# Altium PCB 5G智慧网关工装PCB.PcbDoc
Units mm, origin at the board's own origin, x right, y up, seen from the top; angles counter-clockwise.
Board outline 150.43 x 130.46 mm, 2 copper layers (Component Side, Bottom Layer), stack 0.325 mm thick; 117 components, 102 nets, 381 pads, 294 vias.
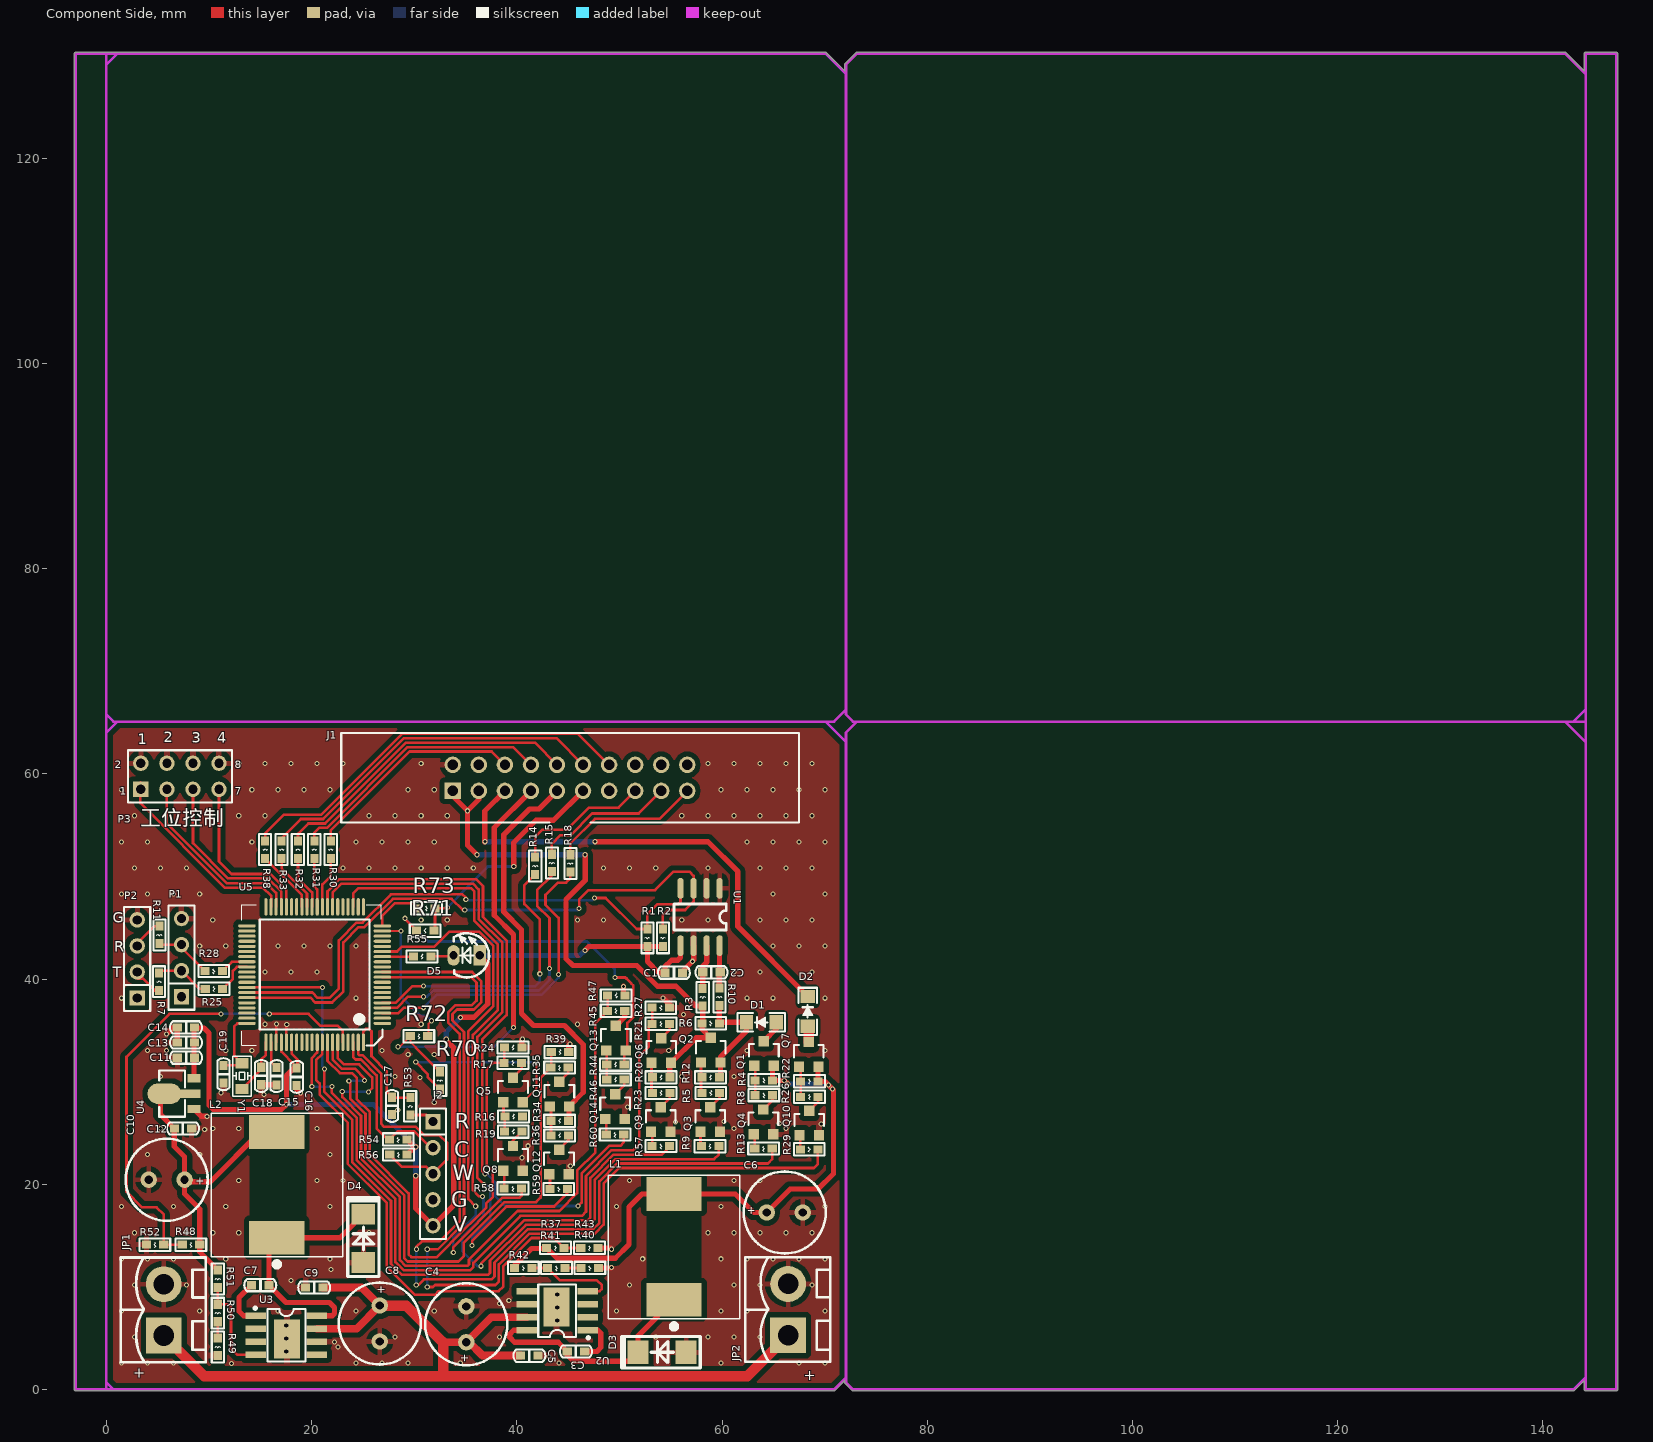
[diagram p0: Component Side view]
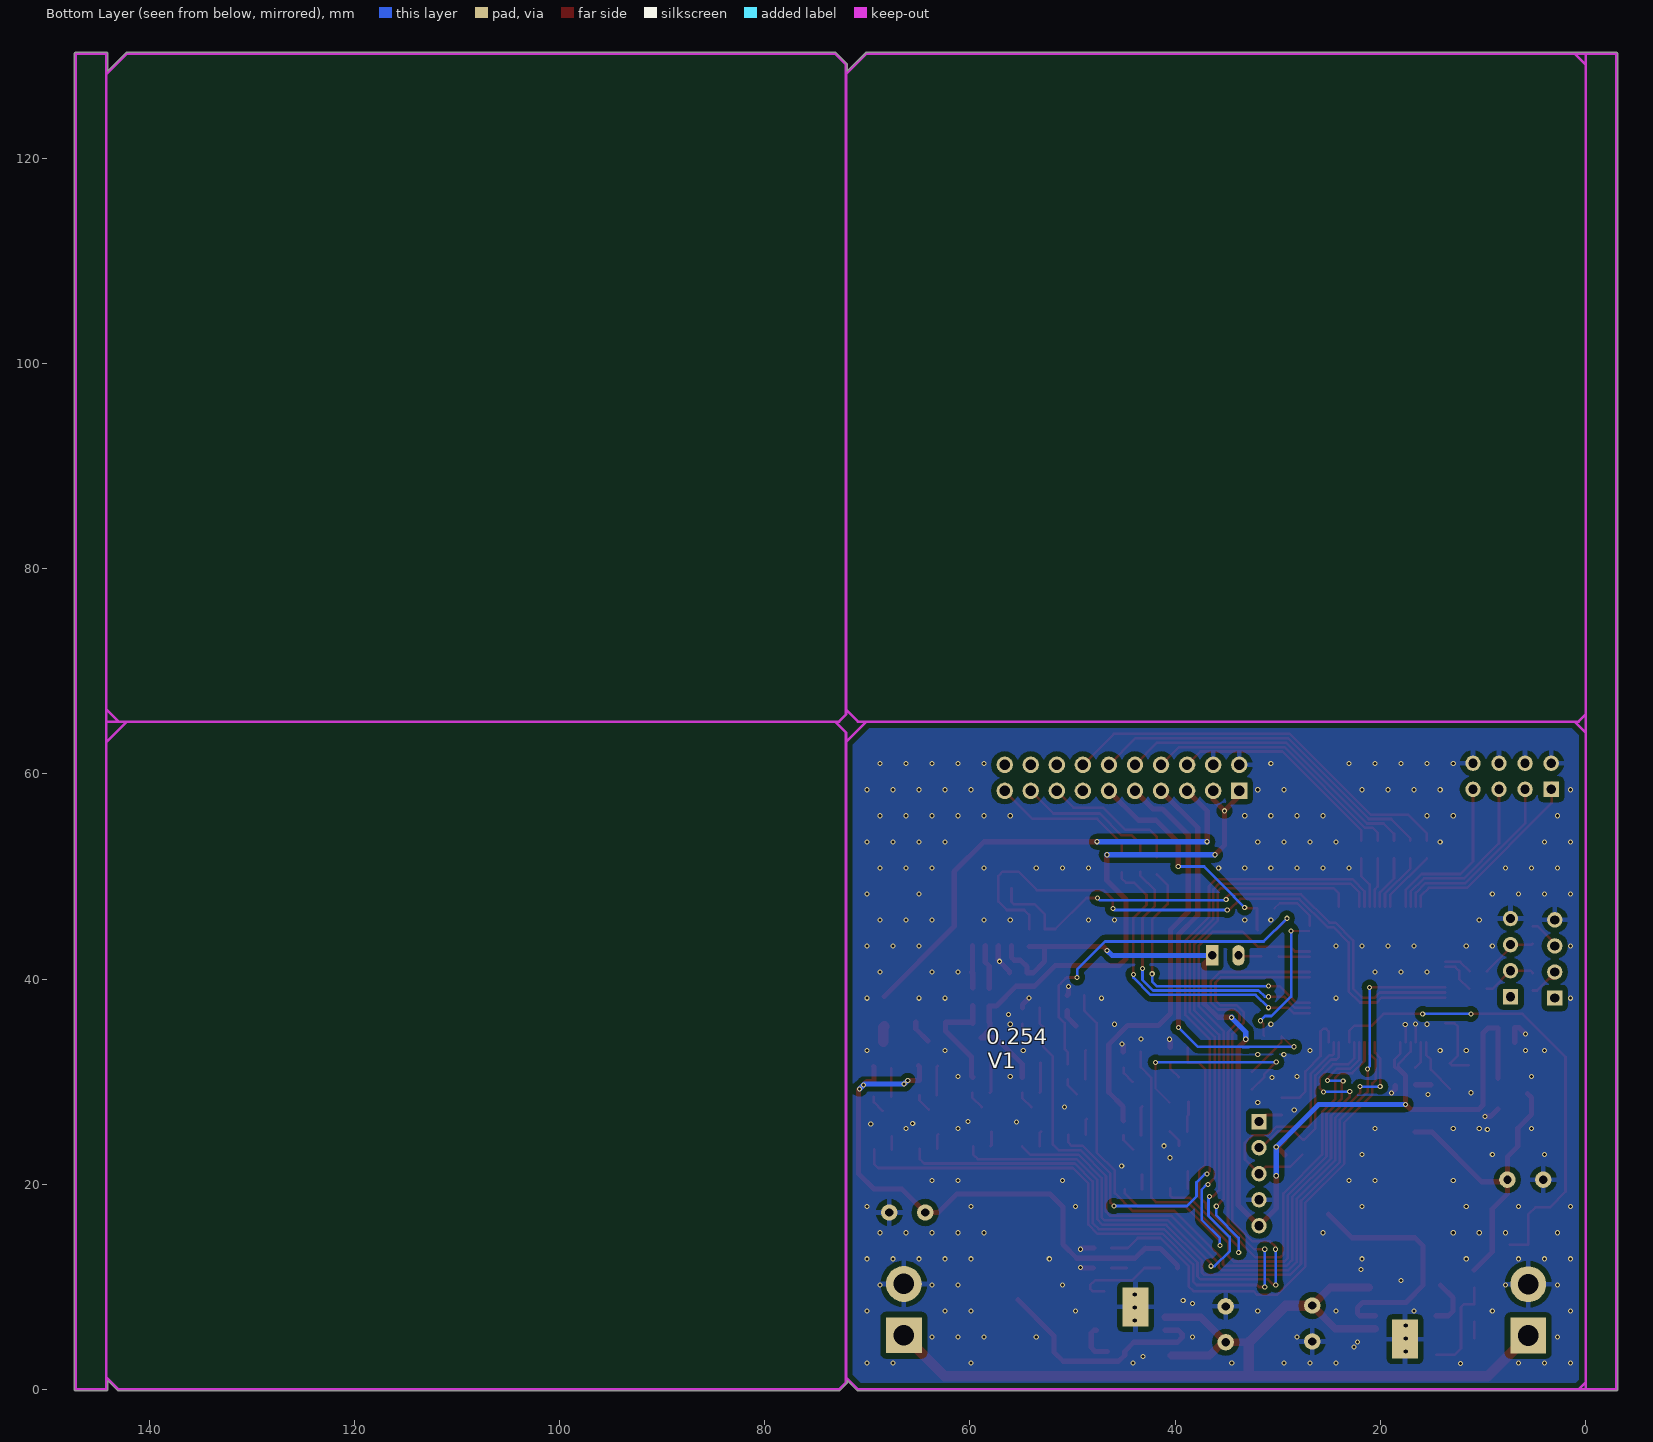
[diagram p1: Bottom Layer view, seen from below]

## Layer stack, top to bottom
Top Solder: solder mask 0.0102, Solder Resist, Dk 3.5
Component Side: signal copper 0.0356
Dielectric 1: core 0.254, FR-4, Dk 4.2
Bottom Layer: signal copper 0.0356
Solder Side: solder mask 0.0102, Solder Resist, Dk 3.5

## Board outline
-3,-0.127 0,-0.127 ccw(c0,0) 0.013,-0.127 ccw(c0.025,0) 0.025,-0.127 70.917,-0.127 ccw(c70.917,0) 71.007,-0.09 71.958,0.861 71.958,0.686 ccw(c72.085,0.686) 71.996,0.595 71.995,0.596 72.681,-0.09 72.68,-0.09 ccw(c72.771,0) 72.771,-0.127 143.002,-0.127 ccw(c143.002,0) 143.093,-0.09 143.092,-0.09 144.043,0.861 144.043,0.025 ccw(c144.17,0.025) 144.044,0.013 ccw(c144.17,0) 144.17,-0.127 147.17,-0.127 ccw(c147.17,0) 147.298,0 147.298,130.2 ccw(c147.17,130.2) 147.17,130.328 144.17,130.328 ccw(c144.17,130.2) 144.043,130.2 144.043,128.501 142.254,130.29 ccw(c142.164,130.2) 142.164,130.328 73.152,130.328 ccw(c73.152,130.2) 73.061,130.29 73.062,130.29 71.995,129.224 71.996,129.224 ccw(c72.085,129.134) 71.958,129.134 71.958,128.501 70.169,130.29 ccw(c70.079,130.2) 70.079,130.328 -3,130.328 ccw(c-3,130.2) -3.127,130.2 -3.127,0 ccw(c-3,0)

## Design rules (kind name [scope] priority, off if disabled: settings)
Clearance VIA-VIA [ISVIA vs ISVIA] p1: gap=0.508 ignorepadtopadclearanceinfootprint=FALSE except(0: Arc-Hole Track-Hole SMDPad-Hole THPad-Hole Via-Hole Fill-Hole Poly-Hole Region-Hole Text-Hole)
Clearance VIA-PAD [ISVIA vs ISPAD] p2: gap=0.381 ignorepadtopadclearanceinfootprint=FALSE except(0: Arc-Hole Track-Hole SMDPad-Hole THPad-Hole Via-Hole Fill-Hole Poly-Hole Region-Hole Text-Hole)
Clearance VIA-TRACK [ISVIA vs ISTRACK] p3: gap=0.381 ignorepadtopadclearanceinfootprint=FALSE except(0: Arc-Hole Track-Hole SMDPad-Hole THPad-Hole Via-Hole Fill-Hole Poly-Hole Region-Hole Text-Hole)
Clearance Polygon [InPolygon] p4: gap=0.508 ignorepadtopadclearanceinfootprint=FALSE except(0: Arc-Hole Track-Hole SMDPad-Hole THPad-Hole Via-Hole Fill-Hole Poly-Hole Region-Hole Text-Hole; 1.016: Poly-Poly)
Clearance [All] p5: gap=0.178 ignorepadtopadclearanceinfootprint=FALSE except(0: Arc-Hole Track-Hole SMDPad-Hole THPad-Hole Via-Hole Fill-Hole Poly-Hole Region-Hole Text-Hole)
ComponentClearance [All] p1 off: gap=0.254 collisioncheckmode=3 verticalgap=0.254 showdistances=FALSE
FabricationTestPointUsage TestPointUsage [All] p1: valid=0 allowmultiple=FALSE
FabricationTestpoint Testpoint [(IsPad And (OnTopLayer Or OnBottomLayer))] p1: side=3 testpointundercomponent=TRUE minsize=1.016 maxsize=2.54 preferedsize=1.524 minholesize=0 maxholesize=1.016 preferedholesize=0.813 testpointgrid=0.025 allowsidetop=TRUE allowsidebottom=TRUE usegrid=TRUE gridtolerance=0
HoleSize [All] p1 off: absolutevalues=TRUE maxlimit=7.62 minlimit=0 maxpercent=80.000 minpercent=20.000
HoleToHoleClearance [All] p1 off: gap=0.254 allowstackedmicrovias=TRUE
LayerPairs [All] p1 off: enforce=TRUE
MinimumSolderMaskSliver [All] p1 off: minsoldermaskwidth=0.254
NetAntennae [All] p1 off: netantennaetolerance=0
PlaneConnect [All] p1: planeconnectstyle=Relief reliefexpansion=0.508 reliefentries=4 reliefconductorwidth=0.508 reliefairgap=0.254
PolygonConnect [isvia] p1: connectstyle=Direct reliefconductorwidth=0.381 reliefentries=4 polygonreliefangle="90 Angle" airgapwidth=0.254
PolygonConnect PolygonConnect_1 [All] p2: connectstyle=Relief reliefconductorwidth=0.508 reliefentries=4 polygonreliefangle="90 Angle" airgapwidth=0.508
RoutingVias [All] p1: holewidth=0.254 width=0.508 viastyle="Through Hole" minholewidth=0.127 minwidth=0.127 maxholewidth=1.27 maxwidth=2.54
SilkToBoardRegionClearance [All] p1 off:
SilkToSilkClearance [All] p1 off: silktosilkclearance=0.254
SilkToSolderMaskClearance [IsPad] p1 off: minsilkscreentomaskgap=0.254 clearancetoexposedcopper=TRUE
SolderMaskExpansion [All] p1: expansion=0.102
Width [All] p1: maxlimit=7.62 minlimit=0.203 preferedwidth=0.203
18 further rules are at their usual default settings.

## Classes and differential pairs
component class 5G智慧网关工装1: C1 C2 C3 C4 C5 C6 C7 C8 C9 C10 C11 C12 C13 C14 D1 D2 D3 D4 J1 JP1 JP2 L1 L2 P1 P2 P3 Q1 Q2 Q3 Q4 Q5 Q6 Q7 Q8 Q9 Q10 Q11 Q12 Q13 Q14 R1 R2 R3 R4 R5 R6 R7 R8 R9 R10 R11 R12 R13 R14 R15 R16 R17 R18 R19 R20 R21 R22 R23 R24 R25 R26 R27 R28 R29 R30 R31 R32 R33 R34 R35 R36 R37 R38 R39 R40 R41 R42 R43 R44 R45 R46 R47 R48 R49 R50 R51 R52 R57 R58 R59 R60 R70 R71 R72 R73 U1 U2 U3 U4
component class 5G智慧网关工装2: C15 C16 C17 C18 C19 D5 J2 R53 R54 R55 R56 U5 Y1

## Components (designator, comment, footprint, x,y, rotation, side; value= is the part's Value field where it differs from the comment)
C1 "100nF/50V" CAP0603 56.134,40.615 r180 top
C2 "100nF/50V" CAP0603 58.141,40.665 r0 top
C3 "10N/50V" CAP0603 44.933,3.708 r0 top
C4 "1000uF/16V" CAPPC_350_800_1600 35.077,4.597 r90 top
C5 "100N/50V" CAP0603 40.386,3.302 r0 top
C6 "1000uF/16V" CAPPC_350_800_1600 64.364,17.247 r0 top
C7 "10N/50V" CAP0603 15.824,10.16 r180 top
C8 "1000uF/16V" CAPPC_350_800_1600 26.645,8.179 r270 top
C9 "100N/50V" CAP0603 21.082,9.931 r180 top
C10 "1000uF/16V" CAPPC_350_800_1600 7.62,20.447 r180 top
C11 "10uF/10V" CAP0603 8.585,32.334 r180 top
C12 "100nF/50V" CAP0603 6.629,25.451 r0 top
C13 "100N/50V" CAP0603 8.585,33.807 r180 top
C14 "22pF/50V" CAP0603 8.585,35.281 r180 top
C15 "100nF/50V" CAP0603 16.586,31.369 r270 top
C16 "100nF/50V" CAP0603 18.542,29.642 r90 top
C17 "33pF/50V" CAP0603 27.838,28.473 r270 top
C18 "12pF/50V" CAP0603 15.088,31.394 r270 top
C19 "12pF/50V" CAP0603 11.405,29.896 r90 top
D1 "DSK36" SOD-123FL 65.354,35.789 r180 top
D2 "DSK36" SOD-123FL 68.351,35.331 r90 top
D3 "B340A-SMA" DO-214AC 54.153,3.632 r180 top
D4 "B340A-SMA" DO-214AC 25.044,14.732 r90 top
D5 "LED_T3R" LED2_300 36.373,42.316 r270 top
J1 "DC254_2*10" DC254_2*10 45.187,59.614 r90 top
J2 "PIN254_1*5*WXHJ" PIN254_1*5*1100S 31.826,26.111 r270 top
JP1 "KF129_508_2" KF129_508_2 5.588,5.258 r90 top
JP2 "KF129_508_2" KF129_508_2 66.446,5.283 r90 top
L1 "LQS1260M2200_47uH" LQS1212 55.321,13.894 r90 top
L2 "LQS1260M2200_47uH" LQS1212 16.612,19.939 r90 top
P1 "PIN254_1*4*WXHJ" PIN254_1*4*1100S 7.315,38.278 r90 top
P2 "PIN254_1*4*WXHJ" PIN254_1*4*1100S 2.997,38.151 r90 top
P3 "Header 4X2" HDR2X4 3.353,58.496 r0 top
Q1 "RZR040P01TL" SOT-23 64.079,32.751 r0 top
Q2 "RZR040P01TL" SOT-23 58.903,33.071 r0 top
Q3 "NPNS-9013" SOT-23 58.852,26.314 r0 top
Q4 "NPNS-9013" SOT-23 64.033,26.086 r0 top
Q5 "PNPS-9012" SOT-23 39.624,29.185 r0 top
Q6 "PNPS-9012" SOT-23 54.077,33.045 r0 top
Q7 "RZR040P01TL" SOT-23 68.453,32.664 r0 top
Q8 "NPNS-9013" SOT-23 39.624,22.53 r0 top
Q9 "NPNS-9013" SOT-23 54.026,26.314 r0 top
Q10 "NPNS-9013" SOT-23 68.504,25.959 r0 top
Q11 "PNPS-9012" SOT-23 44.145,28.778 r0 top
Q12 "NPNS-9013" SOT-23 44.115,22.184 r0 top
Q13 "PNPS-9012" SOT-23 49.657,34.239 r0 top
Q14 "NPNS-9013" SOT-23 49.581,27.559 r0 top
R1 "10K 5%" RES0603 52.73,43.18 r90 top
R2 "10K 5%" RES0603 54.229,43.18 r90 top
R3 "10R 5%" RES0603 58.115,37.389 r90 top
R4 "2M 5%" RES0603 64.922,30.124 r180 top
R5 "200K 5%" RES0603 58.064,28.905 r0 top
R6 "100R 1%" RES0603 59.741,35.687 r180 top
R7 "22R 5%" RES0603 5.131,40.589 r270 top
R8 "200K 5%" RES0603 64.922,28.677 r180 top
R9 "1K 5%" RES0603 57.988,23.724 r0 top
R10 "10R 5%" RES0603 59.741,37.414 r90 top
R11 "22R 5%" RES0603 5.156,43.459 r90 top
R12 "2M 5%" RES0603 58.039,30.429 r0 top
R13 "1K 5%" RES0603 64.897,23.47 r180 top
R14 "1K 5%" RES0603 41.783,50.19 r90 top
R15 "1K 5%" RES0603 43.409,50.47 r90 top
R16 "100K 5%" RES0603 38.837,26.619 r0 top
R17 "100K 5%" RES0603 40.462,31.826 r180 top
R18 "1K 5%" RES0603 45.212,50.419 r90 top
R19 "10K 1%" RES0603 38.811,25.146 r0 top
R20 "100K 5%" RES0603 53.213,30.429 r0 top
R21 "100K 5%" RES0603 54.889,35.636 r180 top
R22 "2M 5%" RES0603 69.367,30.023 r180 top
R23 "10K 1%" RES0603 53.213,28.905 r0 top
R24 "10K 5%" RES0603 38.786,33.35 r0 top
R25 "1K 5%" RES0603 11.328,39.04 r180 top
R26 "200K 5%" RES0603 69.367,28.524 r180 top
R27 "10K 5%" RES0603 53.188,37.211 r0 top
R28 "1K 5%" RES0603 11.303,40.767 r180 top
R29 "1K 5%" RES0603 69.342,23.393 r180 top
R30 "1K 5%" RES0603 21.869,53.467 r270 top
R31 "1K 5%" RES0603 20.269,53.467 r270 top
R32 "1K 5%" RES0603 18.669,53.467 r270 top
R33 "1K 5%" RES0603 17.069,53.467 r270 top
R34 "100K 5%" RES0603 43.332,26.187 r0 top
R35 "100K 5%" RES0603 45.009,31.369 r180 top
R36 "10K 1%" RES0603 43.332,24.765 r0 top
R37 "100K 5%" RES0603 44.602,13.792 r180 top
R38 "1K 5%" RES0603 15.469,53.467 r270 top
R39 "10K 5%" RES0603 43.358,32.893 r0 top
R40 "20K 1%" RES0603 47.955,11.836 r180 top
R41 "10K 1%" RES0603 44.704,11.836 r180 top
R42 "100K 1%" RES0603 41.478,11.836 r180 top
R43 "10K 5%" RES0603 47.93,13.792 r180 top
R44 "100K 5%" RES0603 48.768,31.674 r0 top
R45 "100K 5%" RES0603 50.521,36.906 r180 top
R46 "10K 1%" RES0603 48.768,30.226 r0 top
R47 "10K 5%" RES0603 48.844,38.405 r0 top
R48 "100K 5%" RES0603 7.391,14.122 r0 top
R49 "20K 5%" RES0603 10.846,3.302 r90 top
R50 "10K 1%" RES0603 10.846,6.604 r90 top
R51 "100K 1%" RES0603 10.846,9.931 r90 top
R52 "10K 5%" RES0603 3.886,14.122 r0 top
R53 "100R 5%" RES0603 29.616,28.448 r270 top
R54 "10K 5%" RES0603 29.286,24.359 r180 top
R55 "1K 5%" RES0603 29.921,42.215 r0 top
R56 "10K 5%" RES0603 29.312,22.885 r180 top
R57 "1K 5%" RES0603 54.889,23.724 r180 top
R58 "1K 5%" RES0603 40.462,19.583 r180 top
R59 "1K 5%" RES0603 44.933,19.533 r180 top
R60 "1K 5%" RES0603 50.419,24.841 r180 top
R70 "0" RES0603 32.512,29.261 r90 top
R71 "0" RES0603 30.226,44.729 r0 top
R72 "1K 5%" RES0603 29.616,34.442 r0 top
R73 "1K 5%" RES0603 32.029,46.888 r180 top
U1 "INA219" SO-8 59.766,48.844 r270 top
U2 "TPS5430DDA" SOP-8-P 46.914,5.766 r180 top
U3 "TPS5430DDA" SOP-8-P 14.554,7.188 r0 top
U4 "CE6232A33P" SOT-89 7.645,28.829 r90 top
U5 "FM33LG0x8" LQFP80 20.295,40.437 r180 top
Y1 "32.768kD" SMD-3215_2P 13.208,29.286 r90 top

## Footprints (in the part's own frame and the unit in brackets; to place one, negate y for a bottom-side part, rotate by r counter-clockwise, add the part's x,y. Pads: shape width x height; smd on the part's side, far side on the other; paste and mask are expansions set on the pad)
CAP0603 [mil]
  rect 35x31 smd: 1(-0.49,0) 2(66.51,0)
  silkscreen extent -29,-24 94,23, body extent 1,-15 72,15, height 20
CAPPC_350_800_1600 [mm]
  round 1.6 hole 0.8: 1(0,0) 2(3.5,0)
  silkscreen extent -2.25,-4 5.75,4, body extent -2.26,-4 5.75,4, height 15.11
DC254_2*10 [mm]
  rect 1.6x1.6 hole 1: 1(-1.27,11.43)
  round 1.6 hole 1: 2(1.27,11.43) 3(-1.27,8.89) 4(1.27,8.89) 5(-1.27,6.35) 6(1.27,6.35) 7(-1.27,3.81) 8(1.27,3.81) 9(-1.27,1.27) 10(1.27,1.27) 11(-1.27,-1.27) 12(1.27,-1.27) 13(-1.27,-3.81) 14(1.27,-3.81) 15(-1.27,-6.35) 16(1.27,-6.35) 17(-1.27,-8.89) 18(1.27,-8.89) 19(-1.27,-11.43) 20(1.27,-11.43)
  silkscreen extent -4.35,-22.3 4.35,22.3
DO-214AC [mil]
  rect 80x90.55 smd: 1(-92.5,0) 2(92.5,0)
  silkscreen extent -146,-60 156,60, body extent -91,-53 90,53, height 94
HDR2X4 [mm] "Connector; Header; 4x2 Position"
  rect 1.5x1.5 hole 0.9: 1(0,0)
  round 1.5 hole 0.9: 2(0,2.54) 3(2.54,0) 4(2.54,2.54) 5(5.08,0) 6(5.08,2.54) 7(7.62,0) 8(7.62,2.54)
  silkscreen extent -1.27,-1.27 8.89,3.81
KF129_508_2 [mm]
  rect 3.5x3.5 hole 2: 1(0,0)
  round 3.5 hole 2: 2(5,0)
  silkscreen extent -2.6,-4.1 7.6,4.2
LED2_300 [mm]
  rect 2x1.2 hole 0.813: 1(0,0)
  oval 2x1.2 hole 0.813: 2(0,-2.54)
  silkscreen extent -2.16,-2.53 2.16,0.91, body extent -1.65,-2.91 1.64,0.39, height 5.51
LQFP80 [mm]
  oval 1.7x0.3 smd: 1(-6.6,4.75) 2(-6.6,4.25) 3(-6.6,3.75) 4(-6.6,3.25) 5(-6.6,2.75) 6(-6.6,2.25) 7(-6.6,1.75) 8(-6.6,1.25) 9(-6.6,0.75) 10(-6.6,0.25) 11(-6.6,-0.25) 12(-6.6,-0.75) 13(-6.6,-1.25) 14(-6.6,-1.75) 15(-6.6,-2.25) 16(-6.6,-2.75) 17(-6.6,-3.25) 18(-6.6,-3.75) 19(-6.6,-4.25) 20(-6.6,-4.75) 41(6.6,-4.75) 42(6.6,-4.25) 43(6.6,-3.75) 44(6.6,-3.25) 45(6.6,-2.75) 46(6.6,-2.25) 47(6.6,-1.75) 48(6.6,-1.25) 49(6.6,-0.75) 50(6.6,-0.25) 51(6.6,0.25) 52(6.6,0.75) 53(6.6,1.25) 54(6.6,1.75) 55(6.6,2.25) 56(6.6,2.75) 57(6.6,3.25) 58(6.6,3.75) 59(6.6,4.25) 60(6.6,4.75)
  oval 0.3x1.7 smd: 21(-4.75,-6.6) 22(-4.25,-6.6) 23(-3.75,-6.6) 24(-3.25,-6.6) 25(-2.75,-6.6) 26(-2.25,-6.6) 27(-1.75,-6.6) 28(-1.25,-6.6) 29(-0.75,-6.6) 30(-0.25,-6.6) 31(0.25,-6.6) 32(0.75,-6.6) 33(1.25,-6.6) 34(1.75,-6.6) 35(2.25,-6.6) 36(2.75,-6.6) 37(3.25,-6.6) 38(3.75,-6.6) 39(4.25,-6.6) 40(4.75,-6.6) 61(4.75,6.6) 62(4.25,6.6) 63(3.75,6.6) 64(3.25,6.6) 65(2.75,6.6) 66(2.25,6.6) 67(1.75,6.6) 68(1.25,6.6) 69(0.75,6.6) 70(0.25,6.6) 71(-0.25,6.6) 72(-0.75,6.6) 73(-1.25,6.6) 74(-1.75,6.6) 75(-2.25,6.6) 76(-2.75,6.6) 77(-3.25,6.6) 78(-3.75,6.6) 79(-4.25,6.6) 80(-4.75,6.6)
  silkscreen extent -6.62,-6.81 7.1,6.91, body extent -5.33,-5.33 5.36,5.33, height 2
LQS1212 [mm]
  rect 3.3x5.4 smd: 1(-5.15,0) 2(5.15,0)
  silkscreen extent -8,-6.4 7,6.4, body extent -6.35,-6.1 6.35,6.1, height 6
PIN254_1*4*1100S [mm] "Connector; Header; 4 Position"
  rect 1.5x1.5 hole 0.9: 1(0,0)
  round 1.5 hole 0.9: 2(2.54,0) 3(5.08,0) 4(7.62,0)
  silkscreen extent -1.27,-1.27 8.89,1.27, body extent -1.3,-1.3 8.86,1.24, height 8.54
PIN254_1*5*1100S [mm]
  rect 1.5x1.5 hole 0.9: 1(0,0)
  round 1.5 hole 0.9: 2(2.54,0) 3(5.08,0) 4(7.62,0) 5(10.16,0)
  silkscreen extent -1.27,-1.27 11.43,1.27
RES0603 [mil]
  rect 35x31 smd: 1(0,0) 2(67,0)
  silkscreen extent -26,-24 92,23, body extent 0,-15 71,15, height 12
SMD-3215_2P [mm]
  rect 1x1.3 smd: 1(0,0) 2(2.5,0)
  silkscreen extent -0.69,-0.91 3.19,0.91, body extent -0.3,-0.99 2.9,0.99, height 0.7
SO-8 [mil]
  oval 80x24 smd: 1(0,0) 2(0,-50) 3(0,-100) 4(0,-150) 5(220,-150) 6(220,-100) 7(220,-50) 8(220,0)
  silkscreen extent 60,-175 160,25, body extent -7,-171 229,21, height 67
SOD-123FL [mm]
  rect 1.3x1.4 smd: 1(0.074,0) 2(2.974,0)
  silkscreen extent -0.78,-0.9 3.82,0.9, body extent -0.28,-0.82 3.32,0.82, height 0.95
SOP-8-P [mm]
  rect 2x0.6 smd: 1(0,0) 2(0,-1.27) 3(0,-2.54) 4(0,-3.81) 5(5.94,-3.81) 6(5.94,-2.54) 7(5.94,-1.27) 8(5.94,0)
  rect 2.5x3.8 smd: 9(3.048,-2.286)
  rect 2.5x3.8 smd far side: 9(3.048,-2.286)
  silkscreen extent -0.18,-4.44 4.83,0.86, body extent 0.38,-4.57 5.72,0.76, height 1.8
SOT-23 [mil]
  rect 40x40 smd: 1(-37.4,-47.24) 2(37.4,-47.24) 3(0,47.24)
  silkscreen extent -57,-12 57,35, body extent -57,-55 57,55, height 47
SOT-89 [mm]
  rect 0.8x1.27 smd: 1(-1.5,-0.9) 3(1.5,-0.9)
  oval 2x3.3 smd: 2(0,2)
  rect 0.8x2.54 smd: 2(0,-0.265)
  silkscreen extent -2.25,0 2.25,2.5, body extent -2.25,-1.02 2.25,2.92, height 1.4

## Part data
C1 C2 C12 C15 C16: library part 101020103-0021, "104pF,50 V,±10%,0603,国巨,CC0603KRX7R9BB104", Part Name=0603贴片电容, ID=3, Part Number=101020103-0021, SMD/DIP=SMD
C3 C7: library part 101020103-0007, "10N/50V，±10%，0603", Part Name=0603贴片电容, ID=35, Part Number=101020103-0007
C4 C6 C8 C10: library part 1010203-0029, "1000uF,16 V,±20%,8*20mm,Rubycon,16ZLH1000M", Part Name=电解电容, ID=2, Part Number=1010203-0029, SMD/DIP=DIP
C5 C9 C13: library part 101020103-0021, "100N/50V，±10%，0603", Part Name=0603贴片电容, ID=34, Part Number=101020103-0021
C11: library part 101020103-0026, "106pF,10 V,±10%,0603,村田,GRM188R61A106KE47D", Part Name=0603贴片电容, ID=8, Part Number=101020103-0026, SMD/DIP=SMD
C14: library part 101020103-0009, "22pF,50 V,±5%,0603,国巨,CC0603JRNPO9BN22", Part Name=0603贴片电容, ID=16, Part Number=101020103-0009, SMD/DIP=SMD
C17: library part 101020103-0027, "33pF,50 V,±10%,0603,国巨,CC0603KRNPO9BN33", Part Name=0603贴片电容, ID=17, Part Number=101020103-0027, SMD/DIP=SMD
C18 C19: library part 101020103-0005, "12P,50 V,±5%,0603,国巨,CC0603JRNPO9BN12", Part Name=0603贴片电容, ID=11, Part Number=101020103-0005, SMD/DIP=SMD
D1 D2: library part 101040101-0043, "DSK14,SOD-123FL,1 A,40 V,28 V,台湾强茂集团苏州群鑫电子,DSK14", Part Name=二极管, ID=10, Part Number=101040101-0043, SMD/DIP=SMD
D3 D4: library part 101040101-0014, Part Name=贴片肖特基, ID=24, Part Number=101040101-0014
D5: library part 101040102-0001, "圆形插件,3mm 圆形,插件,红光,湖北匡通电子有限公司,3BB4HC", Part Name=发光二极管, ID=6, Part Number=101040102-0001, SMD/DIP=DIP
J1: library part 1010902-0139, "DC2 2.54mm 2x10pin,2.54mm间距，2x10pin，32×8.55×27.5mm,母头,双排,双排牛角座", Part Name=DC牛角座, ID=4, Part Number=1010902-0139, SMD/DIP=DIP
J2: library part AD_WXHJ_PinHeader_02, "1*5 ，Φ1.0 ，2.54mm，直脚,无需焊接器件", Part Name=排针, ID=17, Part Number=AD_WXHJ_PinHeader_02, SMD/DIP=DIP
JP1 JP2: library part 1010904-0015, "KF129-2P,螺丝紧固,2,ABS,松涛", Part Name=接线端子, ID=7, Part Number=1010904-0015, SMD/DIP=DIP
L1 L2: library part 1010302-0007, "47uH/2.2A,±20%，0.072Ω，L1200X1200X600", Part Name=贴片电感, ID=3, Part Number=1010302-0007
P1 P2: library part AD_WXHJ_PinHeader_01, "1*4 ，Φ1.0 ，2.54mm，直脚,无需焊接器件", Part Name=排针, ID=16, Part Number=AD_WXHJ_PinHeader_01, SMD/DIP=DIP
P3: "Header, 4-Pin, Dual row"
Q1 Q2 Q7: library part 101040201-0010, "RZR040P01TL；1.5v导通,P-MOS,SOT-23,罗姆,RZR040P01TL", Part Name=PMOS管, ID=18, Part Number=101040201-0010, SMD/DIP=SMD
Q3 Q4 Q8 Q9 Q10 Q12 Q14: library part 101040201-0002, "9013,NPN,SOT-23,长电,S9013", Part Name=贴片三极管, ID=15, Part Number=101040201-0002, SMD/DIP=SMD
Q5 Q6 Q11 Q13: library part 101040201-0001, "9012,PNP,SOT-23,JCET;长电,S9012", Part Name=贴片三极管, ID=17, Part Number=101040201-0001, SMD/DIP=SMD
R1 R2 R24 R27 R39 R47 R54 R56: library part 101010103-0003, "国巨,±5%,0603,,155 ℃,-55 ℃,RC0603JR-0710KL,无铅,200 ppm/℃,1/10W,,10K", Part Name=0603贴片电阻, ID=7, Part Number=101010103-0003, SMD/DIP=SMD
R3 R10: library part 101010103-0017, "10R,±5%,1/10W,0603,国巨,RC0603JR-0710RL", Part Name=0603贴片电阻, ID=8, Part Number=101010103-0017, SMD/DIP=SMD
R4 R12 R22: library part 101010103-0025, "国巨,±5%,0603,,155 ℃,-55 ℃,RC0603JR-072ML,含铅,100 ppm/℃,1/10W,,2M", Part Name=0603贴片电阻, ID=20, Part Number=101010103-0025, SMD/DIP=SMD
R5 R8 R26: library part 101010103-0034, "200K,±5%,1/10W,0603,国巨,RC0603JR-07200KL", Part Name=0603贴片电阻, ID=13, Part Number=101010103-0034, SMD/DIP=SMD
R6: library part 101010103-0041, "100Ω,±1%,1/10W,0603,国巨股份有限公司,RC0603FR-07100RL", Part Name=0603贴片电阻, ID=4, Part Number=101010103-0041, SMD/DIP=SMD
R7 R11: library part 101010103-0009, "国巨,±5%,0603,,155 ℃,-55 ℃,RC0603JR-0722RL,无铅,200 ppm/℃,1/10W,,22欧", Part Name=0603贴片电阻, ID=18, Part Number=101010103-0009, SMD/DIP=SMD
R9 R13 R14 R15 R18 R25 R28 R29 R30 R31 R32 R33 R38 R55 R57 R58 R59 R60 R72 R73: library part 101010103-0008, "1K,±5%,1/10W,0603,国巨,RC0603JR-071KL", Part Name=0603贴片电阻, Part Number=101010103-0008, SMD/DIP=SMD
  R9 R13 R14 R15 R18 R25 R28 R29 R30 R31 R32 R33 R38 R57 R58 R59 R60 R72 R73: ID=10
  R55: ID=9
R16 R17 R20 R21 R34 R35 R44 R45 R70 R71: library part 101010103-0005, "国巨,±5%,0603,,155 ℃,-55 ℃,RC0603JR-07100KL,无铅,100 ppm/℃,1/10W,,100K", Part Name=0603贴片电阻, ID=3, Part Number=101010103-0005, SMD/DIP=SMD
R19 R23 R36 R46: library part 101010103-0052, "10K±1%,1/10W,0603", Part Name=0603贴片电阻, ID=6, Part Number=101010103-0052, SMD/DIP=SMD
R37 R43 R48 R52: library part 101010103-0005, "100K±5%,1/10W,0603", Part Name=0603贴片电阻, ID=30, Part Number=101010103-0005
R40: library part 101010103-0048, "20K,±1%,1/10W,0603,国巨,RC0603FR-0720KL", Part Name=0603贴片电阻, ID=14, Part Number=101010103-0048, SMD/DIP=SMD
R41 R50: library part 101010103-0053, "8.2k±1%,1/10W,0603", Part Name=0603贴片电阻, ID=142, Part Number=101010103-0053
R42 R51: library part 101010103-0048, "20K±1%,1/10W,0603", Part Name=0603贴片电阻, ID=139, Part Number=101010103-0048
R49: library part 101010103-0004, "国巨,±5%,0603,,155 ℃,-55 ℃,RC0603JR-0720KL,无铅,200 ppm/℃,1/10W,,20K", Part Name=0603贴片电阻, ID=15, Part Number=101010103-0004, SMD/DIP=SMD
R53: library part 101010103-0022, "100R,±5%,1/10W,0603,国巨,RC0603JR-07100RL", Part Name=0603贴片电阻, ID=5, Part Number=101010103-0022, SMD/DIP=SMD
U1: library part Component_2
U2 U3: library part 101050101-0053, "TPS5430DDA,SOP8,TI,TPS5430DDA", Part Name=电源芯片, ID=9, Part Number=101050101-0053, SMD/DIP=SMD
U4: library part 1010503-0029, "CE6232-3.3,CE6232-3.3,SOT89-3,8V,1.8V,0.11V,3.3V,300mA,0.8uA,南京芯力微电子有限公司", Part Name=线性稳压芯片, ID=5, Part Number=1010503-0029, SMD/DIP=SMD
Y1: library part 1010601-0009, Part Name=贴片晶振, Part Number=1010601-0020, ID=20, SMD/DIP=SMD

## Via types
v1: diameter 0.5, hole 0.3, Component Side to Bottom Layer, tented both sides, 288 vias
v2: diameter 0.813, hole 0.406, Component Side to Bottom Layer, 6 vias

## Nets (pads, with @x,y where several pads share a name; then routed paths per layer and width w, separated by ;. In a path a pad name is that pad's centre, name@x,y a point inside that pad or via, vN(x,y) a via of type N, cw(c..) or ccw(c..) an arc to the next point about the centre after c; other vN are vias at no path point)
3.3V: C1.2 C11.1 C13.1 C14.1 C16.2 D5.1 J2.5 R1.1 R2.1 R54.1 R56.1 U1.5 U4.3 U5.64 U5.66 | length 112.2
  Component Side w0.254: U5.64 17.045,32.917 18.276,31.686 18.276,31.331 C16.2 18.618,31.407 18.618,32.156 18.045,32.73 U5.66
  Component Side w0.508: U4.3 8.545,35.228 9.501,35.228 9.982,34.747 9.982,27.711 10.414,27.28 17.043,27.28 v1(17.551,27.788) 17.551,30.607 C16.2@18.276,31.331 ; R54.1 29.997,23.647 v1@30.074,23.647 ; R56.1 v1@30.074,23.647 ; v1(30.15,20.828) 30.15,17.628 J2.5 33.862,17.987 33.862,33.295 33.122,34.036 v1(33.122,34.138) ; v1(30.15,23.647) v1@30.074,23.647 ; v1(34.493,36.271) 35.835,36.271 37.16,37.596 37.16,41.529 D5.1 ; v1(46.634,42.799) 47.015,43.18 R1.1 ; R2.1 R1.1 ; U1.5 55.956,42.113 55.677,41.834 55.067,41.834 54.445,41.211 C1.2 53.823,40.615 52.73,41.707 R1.1
  Bottom Layer w0.508: v1(17.551,27.788) 26.01,27.788 v1(30.15,23.647) v1(30.15,20.828) ; v1(33.122,34.138) 33.122,34.849 34.493,36.22 v1(34.493,36.271) ; D5.1 36.398,42.291 46.126,42.291 v1(46.634,42.799)
5V: C6.1 L1.2 Q1.2 Q7.2 R4.1 R22.1 R37.2 R42.2 | length 59.1
  Component Side w0.508: R42.2 39.776,12.09 41.427,13.741 R37.2@42.901,13.741 ; R37.2 43.913,12.78 49.592,12.78 50.927,14.115 50.927,17.78 52.191,19.044 L1.2 61.296,19.044 63.094,17.247 C6.1 66.65,19.533 69.367,19.533 70.866,21.031 70.866,29.185 v1(70.764,29.286) v1(70.383,29.667) 70.028,30.023 R22.1 69.367,31.429 Q7.2 ; Q1.2 64.922,31.444 R4.1 v1(66.065,30.124) v1(66.421,29.769)
  Bottom Layer w0.508: v1(66.065,30.124) v1(66.421,29.769) 70.282,29.769 v1(70.383,29.667) v1(70.764,29.286)
5V_dianliu_CHK: R9.2 U5.53 | length 78.2
  Component Side w0.254: U5.53 v1(21.051,39.187) ; v1(21.26,31.242) 21.213,31.195 21.213,29.028 23.952,26.289 23.952,22.175 27.737,18.391 27.737,12.243 28.804,11.176 37.211,11.176 37.389,11.354 37.389,12.55 40.892,16.053 47.066,16.053 47.605,16.591 47.605,20.452 49.606,22.454 59.233,22.454 59.69,22.911 R9.2
  Bottom Layer w0.254: v1(21.051,39.187) 21.051,31.501 21.285,31.267 v1(21.26,31.242)
5V_Out: D1.2 Q2.2 R6.1 R10.1 R12.2 | length 10.9
  Component Side w0.508: R12.2 59.853,30.541 Q2.2 59.853,32.395 62.38,34.923 D1.2 59.842,35.789 R6.1 R10.1
5V_Out1: J1.1 J1.3 Q2.3 Q6.2 R3.1 R6.2 R20.2 | length 56.1
  Component Side w0.508: J1.1 33.757,57.836 v1(35.192,56.401) ; v1(36.119,52.121) 35.192,53.048 v1(35.192,56.401) ; J1.3 36.297,57.506 v1(35.192,56.401) ; v1(46.66,52.121) 46.66,49.606 44.806,47.752 44.806,41.986 45.466,41.326 51.689,41.326 53.721,39.294 55.499,39.294 57.404,37.389 R3.1 58.115,35.763 R6.2 58.039,35.134 Q2.3 57.452,34.271 Q6.2 54.915,31.734 R20.2
  Bottom Layer w0.508: v1(36.119,52.121) v1(46.66,52.121)
5V_zhu_CTL: R13.1 U5.10 | length 88.1
  Component Side w0.254: U5.10 35.53,40.187 36.068,39.648 36.068,37.905 35.624,37.461 34,37.461 33.303,36.764 33.303,35.778 34.421,34.661 34.421,16.387 32.461,14.427 30.734,14.427 30.226,13.919 v1(30.226,13.665) ; v1(30.201,10.198) 30.411,10.198 30.953,10.74 37.537,10.74 37.821,11.024 37.821,12.371 41.07,15.621 47.421,15.621 48.037,16.237 48.037,20.273 49.785,22.022 64.465,22.022 64.897,22.454 R13.1
  Bottom Layer w0.254: v1(30.201,10.198) 30.201,13.64 v1(30.226,13.665)
119: J1.14 R38.1 | length 39.5
  Component Side w0.254: R38.1 15.469,54.204 17.297,56.032 20.951,56.032 28.825,63.906 45.974,63.906 J1.14
119_CHK: R38.2 U5.33 | length 6.2
  Component Side w0.254: R38.2 19.045,48.189 U5.33
ADC_5V: R37.1 R43.2 U5.72 | length 48.9
  Component Side w0.254: U5.72 21.045,32.709 20.447,32.112 20.447,30.155 20.773,29.829 20.773,28.757 23.52,26.01 23.52,21.996 27.305,18.212 27.305,11.989 30.07,9.224 32.033,9.224 32.385,9.576 38.227,9.576 38.684,10.033 38.684,12.013 41.428,14.757 43.637,14.757 R37.1 R43.2
ADC_MCU_5V: R48.1 R52.2 U5.76 | length 47
  Component Side w0.254: R48.1 R52.2 5.588,17.043 4.877,17.755 3.48,17.755 1.956,19.279 1.956,32.41 6.147,36.601 v1(11.176,36.601) ; v1(15.875,36.601) 19.71,36.601 20.879,35.433 22.555,35.433 23.045,34.944 U5.76
  Bottom Layer w0.254: v1(11.176,36.601) v1(15.875,36.601)
anjian1: J1.6 R30.1 | length 21.7
  Component Side w0.254: R30.1 21.869,54.508 29.54,62.179 37.541,62.179 J1.6
anjian1_CTRL: R30.2 U5.29 | length 5.1
  Component Side w0.254: U5.29 21.045,49.213 21.869,50.038 R30.2
anjian2: J1.8 R31.1 | length 26.1
  Component Side w0.254: R31.1 20.269,54.28 20.726,54.737 21.487,54.737 29.361,62.611 39.649,62.611 J1.8
anjian2_CTRL: R31.2 U5.30 | length 4.8
  Component Side w0.254: R31.2 20.269,49.022 20.545,48.747 U5.30
anjian3: J1.10 R32.1 | length 30.5
  Component Side w0.254: R32.1 18.669,54.153 19.685,55.169 21.308,55.169 29.182,63.043 41.758,63.043 J1.10
anjian3_CTRL: R32.2 U5.31 | length 5.3
  Component Side w0.254: R32.2 18.669,49.81 20.045,48.435 U5.31
anjian4: J1.12 R33.1 | length 34.8
  Component Side w0.254: R33.1 17.069,53.721 18.948,55.601 21.13,55.601 29.004,63.475 43.866,63.475 J1.12
anjian4_CTRL: R33.2 U5.32 | length 5.8
  Component Side w0.254: R33.2 17.069,50.8 19.545,48.324 U5.32
DY_SY_V3: J1.11 R71.2 R73.1 | length 23
  Component Side w0.203: R71.2 R71.2@32.029,44.831
  Component Side w0.254: R71.2@32.029,44.831 R73.1 33.35,46.888 33.274,46.965 v1(33.223,46.965)
  Component Side w0.508: v1(39.7,50.978) 39.7,53.315 41.859,55.474 43.586,55.474 J1.11
  Bottom Layer w0.254: v1(33.223,46.965) 34.269,48.01 34.269,48.066 37.18,50.978 v1(39.7,50.978)
DY_SY_V3_1: R73.2 U5.20 | length 5.1
  Component Side w0.203: 29.82,47.396 R73.2
  Component Side w0.254: U5.20 26.895,46.173 28.118,47.396 29.82,47.396
DY_SY_V3_CHK: R45.2 R47.1 U5.75 | length 69.8
  Component Side w0.254: U5.75 22.545,32.319 23.169,31.695 24.622,31.695 25.904,30.413 25.904,29.358 v1(25.548,29.003) ; v1(22.987,29.032) 22.987,28.505 24.816,26.676 24.816,22.533 28.6,18.748 28.6,12.601 29.161,12.04 35.179,12.04 35.335,12.196 35.335,12.648 40.086,17.399 44.145,17.399 45.878,19.131 45.878,21.341 47.65,23.114 47.65,35.738 R45.2 48.844,36.932 R47.1
  Bottom Layer w0.254: v1(22.987,29.032) 25.519,29.032 v1(25.548,29.003)
DY_SY_V3_CHK_CTRL: R60.1 U5.28 | length 68.2
  Component Side w0.254: U5.28 21.545,48.546 22.732,49.733 36.043,49.733 36.703,49.073 36.703,46.053 39.014,43.742 39.014,36.5 36.627,34.112 36.627,21.285 v1(36.906,21.006) ; v1(45.972,17.884) 46.309,18.221 46.309,21.062 48.997,23.749 50.089,23.749 50.419,24.079 R60.1
  Bottom Layer w0.254: v1(36.906,21.006) 37.109,21.006 37.922,20.193 37.922,18.821 38.86,17.884 v1(45.972,17.884)
DY_VCC_3_3V: J1.9 Q11.2 R34.2 | length 40.4
  Component Side w0.508: J1.9 42.164,56.591 41.25,56.591 38.735,54.077 38.735,46.533 40.462,44.806 40.462,36.652 41.631,35.484 44.635,35.484 46.482,33.637 46.482,28.965 Q11.2 45.095,26.248 R34.2
DY_VCC_3_3V_CHK: R35.2 R39.1 U5.74 | length 58.2
  Component Side w0.254: U5.74 22.045,32.14 22.921,31.263 24.21,31.263 25.146,30.328 v1(25.146,30.099) ; v1(23.622,30.074) 23.745,29.951 23.745,28.358 25.248,26.855 25.248,22.712 29.032,18.927 29.032,12.779 29.34,12.471 34.315,12.471 34.819,12.975 34.819,14.276 38.806,18.263 41.885,18.263 42.316,18.694 42.316,30.378 R35.2 43.358,31.42 R39.1
  Bottom Layer w0.254: v1(23.622,30.074) 25.121,30.074 v1(25.146,30.099)
DY_VCC_3_3V_CHK_CTRL: R59.1 U5.27 | length 66.3
  Component Side w0.254: U5.27 22.045,48.435 22.911,49.301 35.712,49.301 36.271,48.743 36.271,45.875 38.583,43.563 38.583,36.805 36.148,34.37 36.148,20.621 v1(36.805,19.964) ; v1(35.636,14.021) 35.636,14.482 38.985,17.831 43.637,17.831 44.933,19.126 R59.1
  Bottom Layer w0.254: v1(35.636,14.021) 35.636,14.757 37.41,16.531 37.41,19.478 36.924,19.964 v1(36.805,19.964)
DY_VDD: J1.7 R70.2 R72.1 | length 43.7
  Component Side w0.203: v1(28.423,33.401) 28.575,33.401 R72.1 29.616,33.858 29.686,33.788 29.712,33.788 30.141,33.359 30.141,33.334
  Component Side w0.254: 30.141,33.334 R70.2
  Component Side w0.508: v1(39.675,35.281) 39.675,44.348 37.795,46.228 37.795,54.762 J1.7
  Bottom Layer w0.254: v1(28.423,33.401) 29.078,33.401 29.099,33.422 29.727,33.422 29.749,33.401 31.618,33.401 31.639,33.422 32.267,33.422 32.289,33.401 32.786,33.401 32.808,33.38 33.436,33.38 33.457,33.401 37.795,33.401 v1(39.675,35.281)
DY_VDD_1: R72.2 U5.19 | length 13.8
  Component Side w0.203: U5.19 28.694,44.687 v1(28.702,44.679) ; R72.2 31.411,34.535 31.411,35.653 v1(31.699,35.941)
  Bottom Layer w0.254: v1(28.702,44.679) 28.702,38.303 30.607,36.398 31.242,36.398 v1(31.699,35.941)
DY_VDD_CHK: R17.2 R24.1 U5.73 | length 51.8
  Component Side w0.254: U5.73 21.545,32.029 22.742,30.832 23.936,30.832 24.38,30.388 24.38,28.333 25.679,27.034 25.679,22.891 29.464,19.106 29.464,13.157 29.718,12.903 32.207,12.903 33.303,13.999 33.303,14.005 33.747,14.449 33.753,14.449 37.008,17.704 37.008,18.105 37.664,18.761 37.664,21.32 37.059,21.925 37.059,31.191 37.694,31.826 R17.2 R24.1@38.76,33.325
DY_VDD_CHK_CTRL: R58.1 U5.15 | length 54.2
  Component Side w0.254: U5.15 28.336,42.687 28.804,43.155 31.953,43.155 33.426,44.628 36.297,44.628 37.719,43.205 37.719,37.364 35.285,34.93 35.285,18.563 v1(35.992,17.856) ; v1(33.807,13.36) 33.807,13.875 38.627,18.694 40.284,18.694 40.462,18.872 R58.1
  Bottom Layer w0.254: v1(33.807,13.36) 33.807,14.783 35.992,16.967 v1(35.992,17.856)
DY_ZHU_CHK: R21.2 R27.1 U5.71 | length 71.5
  Component Side w0.254: v1(20.015,29.515) 20.015,32.291 20.545,32.82 U5.71 ; v1(21.971,29.515) 21.971,28.91 24.384,26.497 24.384,22.354 28.169,18.57 28.169,12.422 28.982,11.608 35.458,11.608 35.767,11.917 35.767,12.328 40.355,16.916 46.33,16.916 46.741,17.328 46.741,20.81 49.248,23.317 51.359,23.317 51.918,23.876 51.918,32.461 52.857,33.401 52.857,35.306 R21.2 R27.1
  Bottom Layer w0.254: v1(20.015,29.515) v1(21.971,29.515)
DY_ZHU_CHK_CTRL: R57.1 U5.23 | length 80.1
  Component Side w0.254: U5.23 24.045,48.352 24.562,48.87 35.534,48.87 35.839,48.564 35.839,45.696 38.151,43.384 38.151,36.983 35.716,34.549 35.716,19.427 36.322,18.821 v1(36.652,18.821) ; v1(36.525,12.014) 36.525,12.297 40.713,16.485 46.887,16.485 47.173,16.77 47.173,20.631 49.427,22.885 54.127,22.885 54.889,23.647 R57.1
  Bottom Layer w0.254: v1(36.525,12.014) 36.144,12.014 34.696,13.462 34.696,14.859 36.75,16.912 36.75,18.724 v1(36.652,18.821)
GND: C1.1 C4.2 C5.2 C6.2 C8.2 C9.2 C10.2 C11.2 C12.2 C13.2 C14.2 C15.2 C16.1 C17.2 C18.2 C19.1 D3.1 D4.1 J1.2 J1.4 J2.4 JP1.2 JP2.2 P1.4 P2.4 P3.2 P3.4 P3.6 P3.8 Q3.2 Q4.2 Q8.2 Q9.2 Q10.2 Q12.2 Q14.2 R24.2 R27.2 R39.2 R40.1 R43.1 R47.2 R49.1 R52.1 U1.1 U1.2 U1.6 U2.6 U2.9 U3.6 U3.9 U4.1 U5.63 U5.65 | length 19.9
  Component Side w0.254: U5.63 16.545,35.595 v1(16.561,35.611) ; U5.65 17.545,35.553 v1(17.577,35.585)
  Component Side w0.508: v1(5.842,34.646) 6.477,35.281 C14.2 C13.2 ; U4.1 9.255,26.619 v1(9.804,26.619) ; C18.2 16.561,29.705 C15.2 ; C16.1 18.542,29.261 v1(18.923,28.88) ; R24.2 40.488,34.061 v1(40.564,34.138) ; R39.2 45.06,33.553 v1(45.187,33.68) ; R43.1 49.098,13.792 v1(49.225,13.665) ; R40.1 49.174,11.836 v1(49.225,11.887) ; v1(50.394,39.294) 50.394,38.557 R47.2 ; v1(54.254,38.151) 54.889,37.516 R27.2 ; C1.1 56.146,40.754 v1(57.125,41.732) 57.252,41.859 57.252,43.231 U1.6
  other v1: 12.192,2.54 1.468,2.576 4.008,2.576 6.548,2.576 24.328,2.576 26.868,2.576 29.408,2.576 34.488,2.576 44.12,2.565 59.888,2.576 67.508,2.576 70.048,2.576 43.129,3.226 22.555,4.14 22.225,4.623 2.738,5.116 28.138,5.116 38.298,5.116 53.538,5.116 58.618,5.116 61.158,5.116 63.698,5.116 1.468,7.656 9.088,7.656 16.708,7.656 24.328,7.656 31.948,7.656 49.728,7.656 59.888,7.656 62.428,7.656 70.048,7.656 38.329,8.382 39.218,8.661 2.738,10.196 7.818,10.196 50.998,10.196 61.158,10.196 63.698,10.196 68.778,10.196 17.983,10.617 21.895,11.709 1.468,12.736 4.008,12.736 6.548,12.736 11.628,12.736 21.788,12.736 52.268,12.736 59.888,12.736 62.428,12.736 64.968,12.736 67.508,12.736 70.048,12.736 2.738,15.276 7.818,15.276 10.358,15.276 12.898,15.276 25.598,15.276 58.618,15.276 61.158,15.276 63.698,15.276 66.238,15.276 68.778,15.276 1.468,17.816 6.548,17.816 11.628,17.816 21.788,17.816 49.728,17.816 59.888,17.816 70.048,17.816 12.898,20.356 20.518,20.356 23.058,20.356 50.998,20.356 61.158,20.356 63.698,20.356 45.212,21.793 40.513,22.581 4.008,22.896 9.088,22.896 21.788,22.896 41.072,23.749 9.576,25.349 5.278,25.436 10.358,25.436 12.898,25.436 20.518,25.436 61.158,25.436 66.238,25.436 69.672,25.883 65.583,25.933 55.474,26.086 60.198,26.111 28.397,27.254 50.8,27.534 31.948,27.976 15.342,28.743 11.151,28.921 30.556,30.404 5.278,30.516 28.138,30.516 56.078,30.516 61.158,30.516 29.413,32.664 31.953,32.664 4.008,33.056 5.867,33.045 11.628,33.056 14.168,33.056 26.868,33.056 54.808,33.056 62.428,33.056 70.048,33.056 43.332,34.163 15.438,35.596 30.678,35.596 45.918,35.596 56.078,35.596 56.261,36.551 1.468,38.136 24.328,38.136 47.188,38.136 62.428,38.136 64.968,38.136 70.048,38.136 15.438,40.676 17.978,40.676 20.518,40.676 61.158,40.676 63.698,40.676 68.778,40.676 1.468,43.216 9.088,43.216 11.628,43.216 16.708,43.216 19.248,43.216 21.788,43.216 24.328,43.216 64.968,43.216 67.508,43.216 70.048,43.216 10.358,45.756 30.678,45.756 33.218,45.756 45.918,45.756 48.458,45.756 56.078,45.756 58.618,45.756 63.698,45.756 66.238,45.756 68.778,45.756 1.468,48.296 4.008,48.296 6.548,48.296 9.088,48.296 64.968,48.296 70.048,48.296 2.738,50.836 5.278,50.836 7.818,50.836 23.058,50.836 25.598,50.836 28.138,50.836 30.678,50.836 33.218,50.836 35.758,50.836 48.458,50.836 50.998,50.836 53.538,50.836 58.618,50.836 63.698,50.836 66.238,50.836 68.778,50.836 1.468,53.376 4.008,53.376 14.168,53.376 24.328,53.376 26.868,53.376 29.408,53.376 31.948,53.376 62.428,53.376 64.968,53.376 67.508,53.376 70.048,53.376 2.738,55.916 12.898,55.916 15.438,55.916 25.598,55.916 28.138,55.916 30.678,55.916 33.218,55.916 56.078,55.916 58.618,55.916 61.158,55.916 63.698,55.916 66.238,55.916 68.778,55.916 1.468,58.456 14.168,58.456 16.708,58.456 19.248,58.456 21.788,58.456 29.408,58.456 31.948,58.456 59.888,58.456 62.428,58.456 64.968,58.456 67.508,58.456 70.048,58.456 12.898,60.996 15.438,60.996 17.978,60.996 20.518,60.996 23.058,60.996 30.678,60.996 58.618,60.996 61.158,60.996 63.698,60.996 66.238,60.996 68.778,60.996
  other v2: 17.529,3.708 17.529,4.978 17.529,6.248 43.939,6.706 43.939,7.976 43.939,9.246
gongwei1: P3.1 U5.39 | length 19.6
  Component Side w0.254: P3.1@3.302,59.182 3.302,57.15 11.557,48.895 15.278,48.895 16.045,48.129 U5.39
gongwei2: P3.3 U5.38 | length 18.1
  Component Side w0.254: P3.3 5.893,55.17 11.71,49.352 15.596,49.352 16.545,48.403 U5.38
gongwei3: P3.5 U5.37 | length 17.3
  Component Side w0.254: P3.5 8.433,53.241 11.864,49.809 15.749,49.809 17.045,48.514 U5.37
gongwei4: P3.7 U5.36 | length 16.4
  Component Side w0.254: P3.7 10.973,51.46 12.192,50.241 15.977,50.241 17.545,48.673 U5.36
INA1_SCL: R1.2 U1.4 U5.54 | length 54.5
  Component Side w0.254: U5.54 20.063,38.687 20.574,38.176 21.742,38.176 22.657,39.091 22.657,43.764 24.384,45.491 24.968,45.491 27.737,48.26 34.696,48.26 35.027,47.93 v1(35.027,47.752) ; v1(47.574,47.904) 48.666,47.904 51.689,44.882 R1.2 52.73,46.33 53.696,47.295 55.728,47.295 55.956,47.523 U1.4 U1.4@55.982,48.87
  Bottom Layer w0.254: v1(35.027,47.752) 35.027,47.879 35.204,47.701 47.371,47.701 v1(47.574,47.904)
INA1_SDA: R2.2 U1.3 U5.55 | length 60.8
  Component Side w0.254: U5.55 19.878,38.187 20.345,37.719 21.996,37.719 23.089,38.811 23.089,43.585 24.563,45.06 25.147,45.06 27.916,47.828 33.655,47.828 34.747,46.736 v1(34.925,46.736) ; v1(46.076,46.863) 46.076,47.752 46.99,48.666 53.467,48.666 55.27,50.47 56.82,50.47 57.226,50.063 U1.3 57.226,47.549 56.413,46.736 54.712,46.736 54.229,46.253 R2.2
  Bottom Layer w0.254: v1(34.925,46.736) 45.949,46.736 v1(46.076,46.863)
LED: R55.1 U5.14 | length 3
  Component Side w0.254: U5.14 29.893,42.187 R55.1
NetC2_1: C2.1 R3.2 U1.7 | length 4.3
  Component Side w0.508: R3.2 58.128,39.104 C2.1 58.128,41.263 58.522,41.656 58.522,43.231 U1.7
NetC2_2: C2.2 R10.2 U1.8 | length 4.2
  Component Side w0.508: R10.2 59.741,40.576 C2.2 59.766,40.729 U1.8
NetC3_1: C3.1 D3.2 L1.1 U2.8 | length 22.8
  Component Side w0.508: U2.8 39.675,5.766 39.319,5.41 39.319,5.055 39.776,4.597 44.031,4.597 C3.1 44.92,3.34 45.517,2.743 50.914,2.743 D3.2 51.803,5.226 L1.1
NetC3_2: C3.2 U2.1 | length 3.7
  Component Side w0.508: C3.2 47.803,3.708 48.184,4.089 48.184,5.486 47.904,5.766 U2.1@47.701,5.766
NetC7_1: C7.1 D4.2 L2.1 U3.8 | length 24
  Component Side w0.508: U3.8 22.022,7.188 22.225,7.391 22.225,8.001 21.742,8.484 17.513,8.484 C7.1 15.837,14.014 L2.1 22.752,14.789 D4.2
NetC7_2: C7.2 U3.1 | length 4.8
  Component Side w0.508: C7.2 12.929,8.954 12.929,7.62 13.36,7.188 U3.1
NetC15_1: C15.1 U5.62 | length 2.7
  Component Side w0.254: U5.62 16.045,31.923 C15.1
NetD1_1: D1.1 Q1.3 | length 2.3
  Component Side w0.508: Q1.3 65.28,35.152 D1.1
NetD2_1: D2.1 Q7.3 | length 1.6
  Component Side w1.016: D2.1 68.453,35.304 Q7.3
NetD5_2: D5.2 R55.2 | length 2.3
  Component Side w0.254: R55.2 33.731,42.215 D5.2
NetJ2_1: J2.1 R53.2 | length 2.5
  Component Side w0.254: R53.2 31.191,26.746 J2.1
NetP2_2: P2.2 R7.2 | length 3.3
  Component Side w0.254: P2.2 2.997,40.056 3.556,40.056 4.724,38.887 R7.2
NetP2_3: P2.3 R11.2 | length 3.1
  Component Side w0.254: P2.3 2.997,43.459 4.699,45.161 R11.2
NetQ1_1: Q1.1 R4.2 R8.2 | length 2.9
  Component Side w0.254: Q1.1 63.221,31.459 R4.2 R8.2
NetQ2_1: Q2.1 R5.1 R12.1 | length 3
  Component Side w0.254: Q2.1 57.953,29.017 R5.1
NetQ3_1: Q3.1 R9.1 | length 1.4
  Component Side w0.254: Q3.1 57.902,23.81 R9.1
NetQ3_3: Q3.3 R5.2 | length 1.8
  Component Side w0.254: Q3.3 59.766,28.429 R5.2
NetQ4_1: Q4.1 R13.2 | length 1.5
  Component Side w0.254: Q4.1 63.195,24.774 R13.2
NetQ4_3: Q4.3 R8.1 | length 1.8
  Component Side w0.254: Q4.3 64.922,28.175 R8.1
NetQ5_1: Q5.1 R16.1 R19.1 | length 2.8
  Component Side w0.254: R16.1@38.699,26.756 Q5.1@38.699,28.035 ; R19.1 38.811,26.594 R16.1
NetQ5_2: Q5.2 R70.1 | length 19.8
  Component Side w0.203: Q5.2 41.91,29.321 v1(41.91,31.877)
  Component Side w0.254: v1(30.15,31.902) 31.314,30.738 31.314,30.459 R70.1
  Bottom Layer w0.203: v1@41.885,31.902 v1(41.91,31.877)
  Bottom Layer w0.254: v1(30.15,31.902) v1@41.885,31.902
NetQ5_3: Q5.3 R17.1 | length 1.7
  Component Side w0.254: Q5.3@39.649,30.435 40.462,31.248 R17.1
NetQ6_1: Q6.1 R20.1 R23.1 | length 3
  Component Side w0.254: Q6.1 53.127,28.992 R23.1
NetQ6_3: Q6.3 R21.1 | length 1.7
  Component Side w0.254: Q6.3 54.889,35.058 R21.1
NetQ7_1: Q7.1 R22.2 R26.2 | length 2.8
  Component Side w0.254: R26.2 R22.2 Q7.1@67.666,31.302
NetQ8_1: Q8.1 R58.2 | length 1.7
  Component Side w0.254: R58.2 Q8.1@38.76,21.243
NetQ8_3: Q8.3 R19.2 | length 1.8
  Component Side w0.254: Q8.3 39.624,24.257 R19.2
NetQ9_1: Q9.1 R57.2 | length 1.4
  Component Side w0.254: Q9.1 53.188,25.003 R57.2
NetQ9_3: Q9.3 R23.2 | length 1.8
  Component Side w0.254: Q9.3 54.915,28.403 R23.2
NetQ10_1: Q10.1 R29.2 | length 1.3
  Component Side w0.254: R29.2 Q10.1@67.64,24.672
NetQ10_3: Q10.3 R26.1 | length 1.7
  Component Side w0.254: Q10.3 69.367,28.022 R26.1
NetQ11_1: Q11.1 R34.1 R36.1 | length 2.9
  Component Side w0.254: Q11.1 43.332,27.441 R34.1 R36.1
NetQ11_3: Q11.3 R35.1 | length 1.7
  Component Side w0.254: Q11.3 45.009,30.842 R35.1
NetQ12_1: Q12.1 R59.2 | length 1.4
  Component Side w0.254: R59.2 Q12.1@43.231,20.918
NetQ12_3: Q12.3 R36.2 | length 1.8
  Component Side w0.254: Q12.3 45.034,24.304 R36.2
NetQ13_1: Q13.1 R44.1 R46.1 | length 2.8
  Component Side w0.254: Q13.1 48.768,32.978 R44.1 R46.1
NetQ13_2: Q13.2 R44.2 R71.1 | length 35.2
  Component Side w0.203: v1(29.108,45.923) 29.108,45.847 v1@29.235,45.72 ; R44.2 50.47,32.902 Q13.2
  Component Side w0.254: v1@29.235,45.72 R71.1 ; v1(49.555,40.157) 50.566,40.157 50.672,40.052 50.708,40.052 51.152,39.608 51.152,39.572 51.359,39.365 51.359,36.322 50.775,35.738 50.775,33.207 Q13.2
  Bottom Layer w0.254: v1(29.108,45.923) 31.369,43.663 46.843,43.663 49.555,40.95 v1(49.555,40.157)
NetQ13_3: Q13.3 R45.1 | length 1.8
  Component Side w0.508: Q13.3 50.521,36.303 R45.1
NetQ14_1: Q14.1 R60.2 | length 1.6
  Component Side w0.254: Q14.1 48.717,26.273 R60.2
NetQ14_3: Q14.3 R46.2 | length 1.8
  Component Side w0.254: Q14.3 50.47,29.648 R46.2
NetR40_2: R40.2 R41.1 | length 1.5
  Component Side w0.254: R41.1 R40.2
NetR41_2: R41.2 R42.1 U2.4 | length 9.3
  Component Side w0.254: R42.1 R41.2 44.196,10.643 47.803,10.643 48.285,10.16 48.285,9.779 48.082,9.576 U2.4
NetR49_2: R49.2 R50.1 | length 1.6
  Component Side w0.254: R49.2 R50.1
NetR50_2: R50.2 R51.1 U3.4 | length 9.7
  Component Side w0.254: R51.1 R50.2 11.862,8.306 12.141,8.026 12.141,4.013 12.776,3.378 U3.4
RST: C17.1 R53.1 U5.80 | length 11.1
  Component Side w0.254: U5.80 25.045,34.9 25.298,35.154 25.578,35.154 25.832,34.9 25.832,32.487 27.305,31.013 27.305,29.019 C17.1 27.876,28.448 R53.1
SW_UART_RXD: R28.1 U5.48 | length 2.8
  Component Side w0.254: R28.1 12.223,41.687 U5.48
SW_UART_RXD_1: P1.3 R11.1 R28.2 | length 5.7
  Component Side w0.254: R11.1 5.258,43.358 P1.3 7.315,43.053 R28.2
SW_UART_TXD: R25.1 U5.49 | length 3.7
  Component Side w0.254: R25.1 12.319,40.03 12.319,40.783 12.723,41.187 U5.49
SW_UART_TXD_1: P1.2 R7.1 R25.2 | length 5.3
  Component Side w0.254: R7.1 5.359,40.818 P1.2 9.093,39.04 R25.2
SWCLK: J2.2 R54.2 U5.78 | length 16.8
  Component Side w0.254: U5.78 24.045,32.39 24.278,32.156 24.79,32.156 26.336,30.611 26.336,25.429 27.407,24.359 R54.2 28.397,25.171 29.972,25.171 31.572,23.571 J2.2 ; J2.2@31.394,23.724 J2.2@31.547,23.571
SWIO: J2.3 R56.2 U5.79 | length 24.8
  Component Side w0.254: U5.79 24.545,32.682 24.638,32.588 24.969,32.588 26.768,30.79 26.768,25.908 27.072,25.603 30.151,25.603 30.989,24.765 32.487,24.765 33.198,24.054 33.198,22.403 J2.3 31.14,21.717 28.778,21.717 R56.2
USB_GD: D2.2 J1.5 | length 46.6
  Component Side w0.508: v1(36.881,53.391) 36.881,56.388 J1.5 ; v1(47.625,53.391) 58.623,53.391 61.544,50.47 61.544,45.113 D2.2
  Bottom Layer w0.508: v1(36.881,53.391) v1(47.625,53.391)
USB_GD_CTL: R29.1 U5.11 | length 92.3
  Component Side w0.254: U5.11 35.64,40.687 36.551,39.776 36.551,37.777 35.803,37.029 34.179,37.029 33.735,36.585 33.735,35.957 34.853,34.84 34.853,16.208 32.31,13.665 v1(31.267,13.665) ; v1(31.267,9.982) 31.826,9.982 32.029,10.185 37.922,10.185 38.252,10.516 38.252,12.192 41.249,15.189 47.6,15.189 48.468,16.058 48.468,20.095 49.964,21.59 68.961,21.59 69.342,21.971 R29.1
  Bottom Layer w0.254: v1(31.267,9.982) v1(31.267,13.665)
VIN_5V: C10.1 C12.1 L2.2 R48.2 R51.2 U4.2 | length 30.8
  Component Side w0.508: U4.2@5.645,28.829 5.258,28.441 5.258,26.81 C12.1 6.617,23.685 7.62,22.682 C10.1 C10.1@7.823,20.244 ; R51.2 9.093,13.386 R48.2 9.093,17.602 7.62,19.075 7.62,20.244 C10.1@7.823,20.244 ; L2.2 14.98,25.089 10.135,20.244 C10.1@7.823,20.244
VIN_12V: C4.1 C5.1 C8.1 C9.1 JP1.1 JP2.1 U2.7 U3.7 | length 103.5
  Component Side w0.762: U3.7 24.384,5.918 C8.1 24.892,9.931 C9.1 ; 32.817,4.597 C4.1 ; C5.1 36.652,3.302 35.357,4.597 C4.1 ; U2.7 37.516,7.036 C4.1
  Component Side w1.016: JP1.1 9.55,1.295 32.817,1.295 ; C8.1 29.21,8.179 32.791,4.597 32.817,4.597 32.817,1.295 ; JP2.1 62.459,1.295 32.817,1.295
XT1: C18.1 U5.61 Y1.1 | length 5.5
  Component Side w0.254: Y1.1 15.088,31.166 C18.1 15.088,32.156 15.545,32.613 U5.61
XT2: C19.2 U5.60 Y1.2 | length 7.2
  Component Side w0.254: C19.2 13.007,31.585 Y1.2 12.446,32.548 12.446,35.381 12.752,35.687 U5.60
ZKB_UART_CTRL: R14.1 U5.5 | length 27.7
  Component Side w0.254: U5.5 28.187,37.687 29.82,39.319 v1(30.886,39.319) ; R14.1 40.742,49.149 40.742,47.32 42.24,45.822 v1(42.24,40.513)
  Bottom Layer w0.254: v1(30.886,39.319) 41.808,39.319 42.24,39.751 v1(42.24,40.513)
ZKB_UART_CTRL_1: J1.15 R14.2 | length 13.6
  Component Side w0.254: R14.2 41.783,53.848 42.494,54.559 44.882,54.559 47.041,56.718 49.911,56.718 J1.15
ZKB_UART_RXD: R18.1 U5.3 | length 30.9
  Component Side w0.254: U5.3 28.457,36.687 28.981,37.211 v1(30.912,37.211) ; v1(44.069,40.462) 44.069,45.949 42.799,47.219 42.799,48.209 43.993,49.403 44.803,49.403 45.212,49.812 R18.1
  Bottom Layer w0.254: v1(30.912,37.211) 32.156,38.456 42.393,38.456 44.069,40.132 v1(44.069,40.462)
ZKB_UART_RXD_1: J1.19 R18.2 | length 14.6
  Component Side w0.254: R18.2 45.212,53.238 47.6,55.626 53.899,55.626 J1.19
ZKB_UART_TXD: R15.1 U5.4 | length 29
  Component Side w0.254: U5.4 28.298,37.187 29.389,38.278 v1(30.886,38.278) ; v1(43.181,41.045) 43.181,45.948 41.986,47.142 41.986,48.666 43.409,50.089 R15.1
  Bottom Layer w0.254: v1(30.886,38.278) 31.267,38.278 31.877,38.887 42.139,38.887 43.181,39.93 v1(43.181,41.045)
ZKB_UART_TXD_1: J1.17 R15.2 | length 13.8
  Component Side w0.254: R15.2 43.409,53.188 44.221,54 45.212,54 47.346,56.134 51.867,56.134 J1.17
pads on no net: J1.13 J1.16 J1.18 J1.20 P1.1 P2.1 R16.2 U2.2 U2.3 U2.5 U3.2 U3.3 U3.5 U5.1 U5.2 U5.6 U5.7 U5.8 U5.9 U5.12 U5.13 U5.16 U5.17 U5.18 U5.21 U5.22 U5.24 U5.25 U5.26 U5.34 U5.35 U5.40 U5.41 U5.42 U5.43 U5.44 U5.45 U5.46 U5.47 U5.50 U5.51 U5.52 U5.56 U5.57 U5.58 U5.59 U5.67 U5.68 U5.69 U5.70 U5.77

## Polygon pours and split planes (outlines as drawn)
GND on Bottom Layer "Top Layer-No Net" (solid, pour order 14): 0,0.025 0.025,0 70.917,0 72.085,1.168 72.085,63.094 70.079,65.1 1.067,65.1 0,64.033
GND on Component Side "Top Layer-No Net" (solid, pour order 16): 0.025,0 70.917,0 72.085,1.168 72.085,63.398 70.383,65.1 1.067,65.1 0,64.033 0,0.025

## Keep-outs
Keep-Out Layer:
  lines w0.254: 0,0.025 0.025,0 0.686,0 ; 0,63.652 0,64.033 ; 0,63.932 0,65.1 0,65.786 ; 0,128.753 0,129.134 ; 0,129.032 0,130.2 ; 72.085,63.652 72.085,64.033 ; 72.085,128.753 72.085,129.134 ; 144.145,65.1 144.17,65.126 144.17,66.269 ; 144.17,0 147.17,0 147.17,130.2 144.17,130.2 144.17,128.194 ; 144.17,0.025 144.17,1.168 ; 0,0.686 0,64.033 ; 0,0.686 0.686,0 ; 0,0.686 0,0 -3,0 -3,130.2 0,130.2 ; 0,64.033 1.067,65.1 70.079,65.1 72.085,63.094 72.085,1.168 ; 0,65.786 0.686,65.1 70.917,65.1 72.085,66.269 72.085,128.194 ; 0,65.786 0,129.134 ; 0,129.134 1.067,130.2 ; 0,130.2 1.067,130.2 ; 0.686,0 70.917,0 72.085,1.168 ; 1.067,130.2 70.079,130.2 72.085,128.194 ; 72.085,0.686 72.771,0 143.002,0 144.17,1.168 ; 72.085,0.686 72.085,64.033 ; 72.085,0.686 72.085,1.168 ; 72.085,64.033 73.152,65.1 142.164,65.1 ; 72.085,128.194 72.085,129.134 ; 72.085,129.134 72.085,65.786 72.771,65.1 143.002,65.1 ; 72.085,129.134 73.152,130.2 142.164,130.2 144.17,128.194 ; 142.164,65.1 144.17,65.1 ; 142.164,65.1 144.17,63.094 ; 143.002,65.1 144.17,65.1 ; 143.002,65.1 144.17,66.269 ; 144.17,1.168 144.17,63.094 ; 144.17,63.094 144.17,65.1 ; 144.17,66.269 144.17,128.194

## Other copper
Component Side:
  pour cut-out: 13.912,22.921 13.912,16.957 19.47,16.957 19.51,16.918 19.51,22.96
  pour cut-out: 52.621,16.876 52.621,10.912 58.021,10.912 58.021,16.876

## Silkscreen, mask and mechanical layers (free items; w line width, h text height)
Top Overlay:
  text "2" at 5.588,63.068 h1.02
  text "4" at 10.795,63.043 h1.02
  text "3" at 8.306,63.017 h1.02
  text "1" at 3.048,62.89 h1.02
  text "工位控制" at 3.277,54.508 h2.54
  text "G" at 0.635,45.466 h1.02
  text "R" at 0.737,42.672 h1.02
  text "T" at 0.635,40.183 h1.02
  text "R" at 33.934,25.4 h1.52
  text "C" at 33.884,22.657 h1.52
  text "W" at 33.731,20.371 h1.52
  text "G" at 33.604,17.78 h1.52
  text "V" at 33.731,15.367 h1.52
  text "+" at 2.616,1.118 h1.02
  text "+" at 67.945,0.889 h1.02
Bottom Overlay:
  text "0.254" at 58.42,33.63 h1.52
  text "V1" at 58.268,31.293 h1.52

## Text inside footprints (layer, text, board x,y; h text height)
C4: Top Overlay "+" at 34.577,3.503 h0.76 r270
C6: Top Overlay "+" at 63.269,17.747 h0.76 r180
C8: Top Overlay "+" at 27.145,9.274 h0.76 r90
C10: Top Overlay "+" at 8.715,19.947 h0.76
P3: Top Overlay "2" at 0.813,60.528 h0.76; Top Overlay "1" at 1.321,57.988 h0.76; Top Overlay "7" at 12.497,57.988 h0.76; Top Overlay "8" at 12.497,60.528 h0.76